# Altium PCB 安抚版大号发球机 1.6mm 双面板.PcbDoc (part 3 of 3)
Units mil, origin at the board's own origin, x right, y up, seen from the top; angles counter-clockwise.
Board outline 2637.8 x 5118.11 mil, 2 copper layers (Top Layer, Bottom Layer); 155 components, 97 nets, 435 pads, 221 vias.
Unrouted connection lines stored in the file: 1.
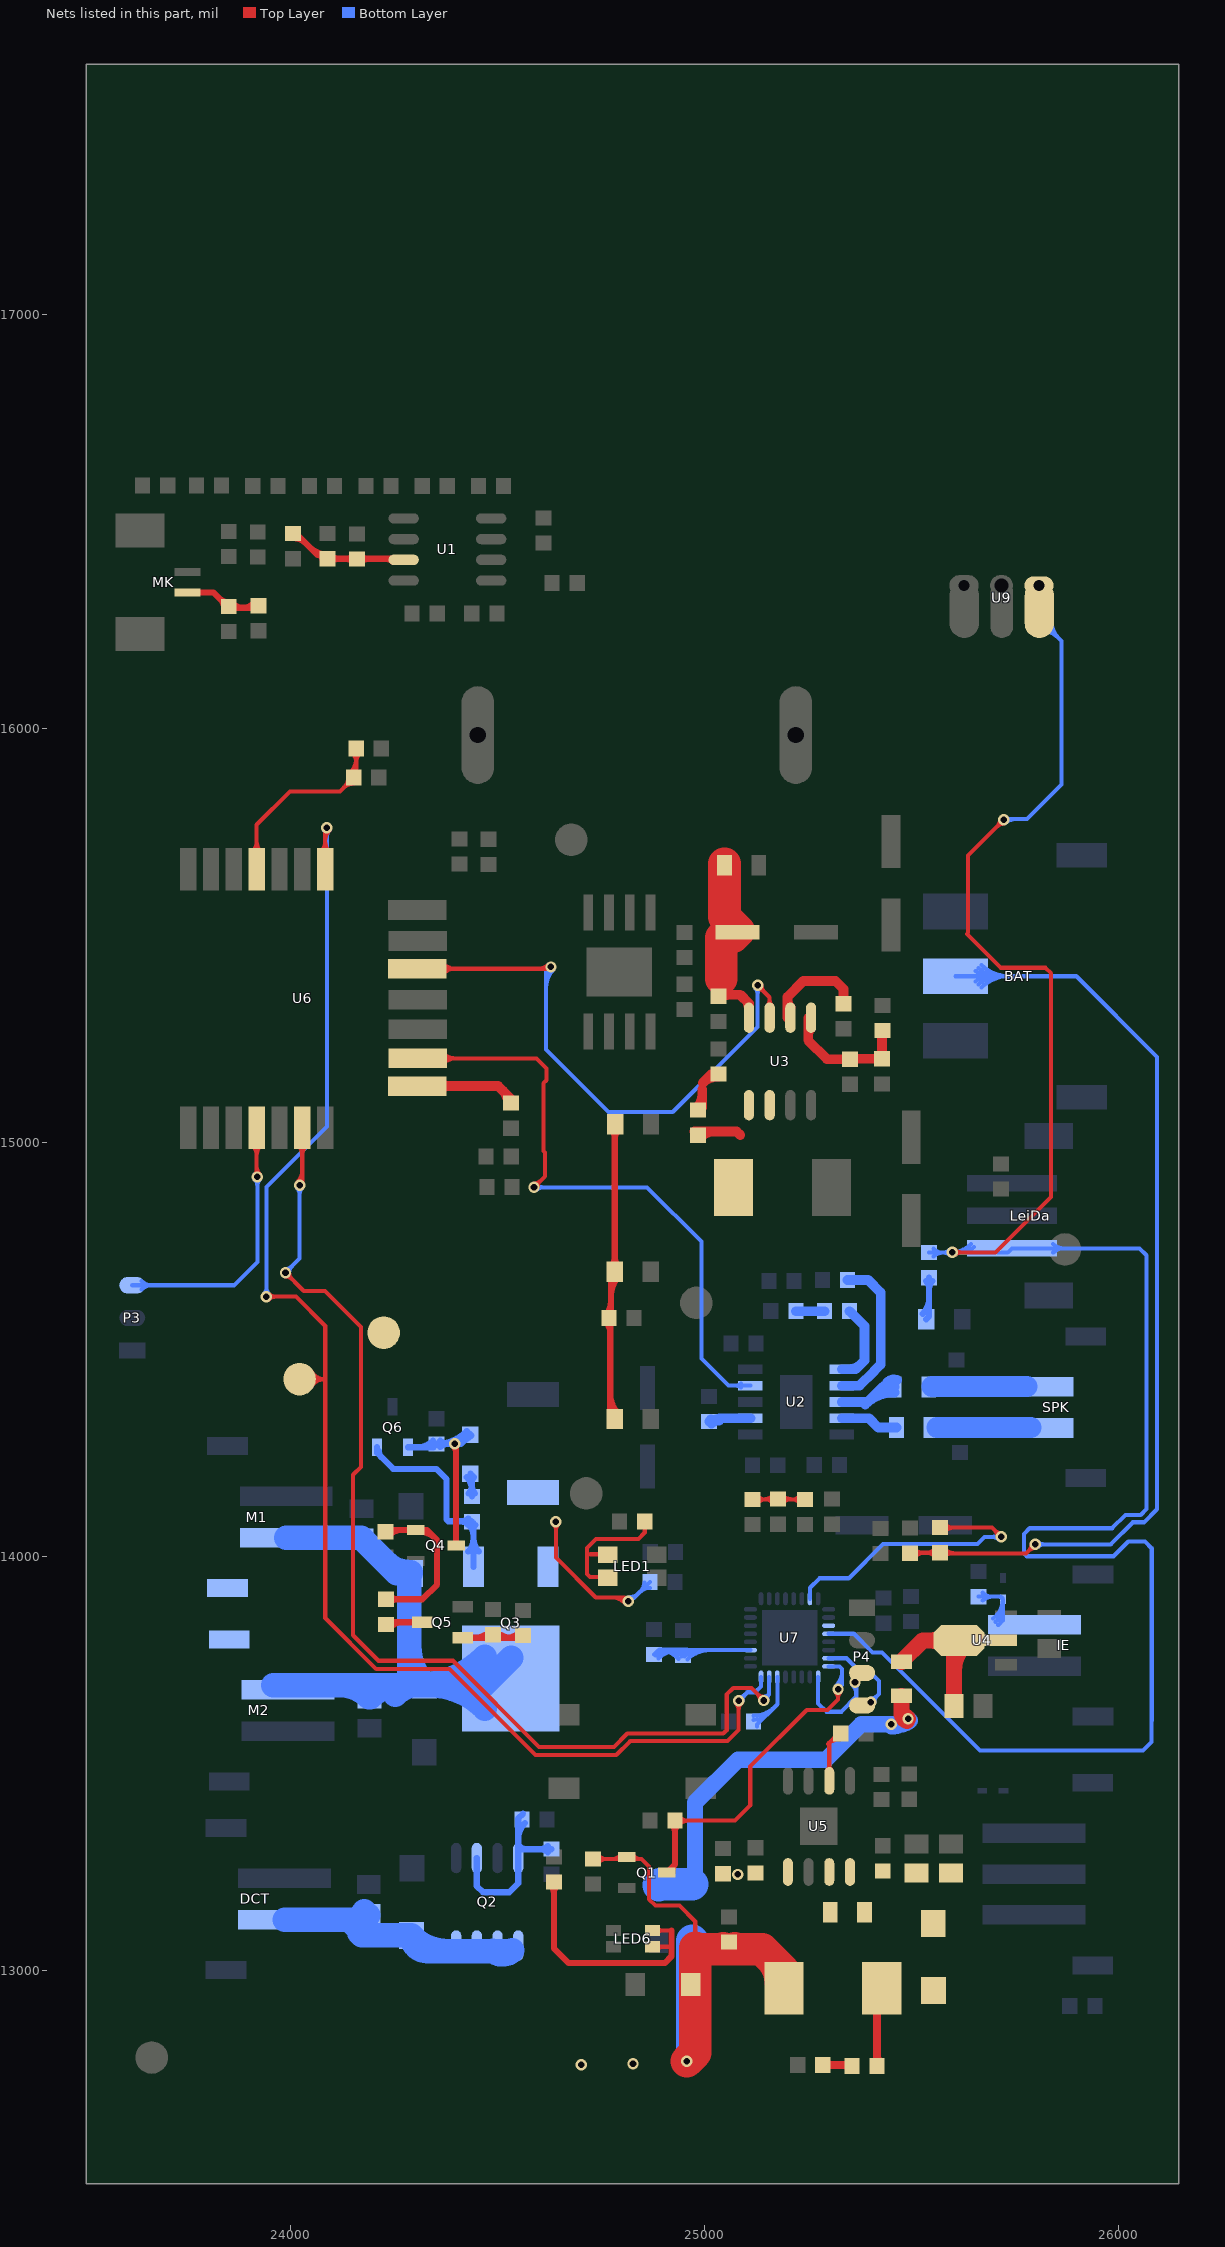
[diagram p3: the nets of this part, all layers, seen from the top]

## Via types
v1: diameter 27.56, hole 15.75, Top Layer to Bottom Layer, tented both sides, 221 vias

## Nets (pads, with @x,y where several pads share a name; then routed paths per layer and width w, separated by ;. In a path a pad name is that pad's centre, name@x,y a point inside that pad or via, vN(x,y) a via of type N, cw(c..) or ccw(c..) an arc to the next point about the centre after c; other vN are vias at no path point) (continued)
NetC13_2: C13.2 U2.2 | length 208.4
  Bottom Layer w23.62: C13.2@25012,14326.69 25014.31,14329 25036,14329 25041.45,14334.45 ; C13.2@25016.62,14332.07 ccw(c25027.59,14348.31) 25041.45,14334.45 ; C13.2@25018.19,14322.8 cw(c25041.45,14305.41) 25041.45,14334.45 ; 25034.25,14329 ccw(c25034.25,14305.42) 25017.58,14322.09 cw(c25047.41,14292.26) 25047.41,14334.45 ; U2.2@25111.53,14334.45 25041.45,14334.45
NetC14_1: C14.1 R10.2 | length 69.1
  Bottom Layer w23.62: C14.1@25221.32,14593 R10.2@25290.37,14593
NetC15_2: C15.2 L1.2 SPK.1 | length 229.4
  Bottom Layer w51.18: L1.2@25549.77,14411 SPK.1@25779.13,14411
NetC17_2: C17.2 L2.2 SPK.2 | length 226.1
  Bottom Layer w51.18: L2.2@25562,14312 SPK.2@25788.13,14312
NetC18_2: C18.2 R11.2 R14.1 U3.1 | length 343.5
  Top Layer w23.62: 25251,15258.97 cw(c25276.33,15258.97) U3.1@25258.42,15276.88 ; U3.1@25251,15301.61 25251,15247 25296.69,15201.31 C18.2@25352,15201.31 ; C18.2@25350,15203.31 C18.2@25352,15201.31 ; R11.2@25430,15270.68 25429,15269.68 R14.1@25429,15202.31 25353,15202.31 C18.2@25352,15201.31
NetC21_1: C21.1 C22.1 FB1.1 U3.4 | length 518.3
  Top Layer w23.62: C22.1@25032,15353.32 25035.68,15357 25087,15357 25108,15336 U3.4@25108,15301.61 ; C22.1@25039.58,15348.72 cw(c25059.56,15328.74) 25059.56,15357 ; 25099.87,15344.14 cw(c25081.65,15325.92) U3.4@25107.41,15325.92
  Top Layer w78.74: 25041,15396 25041,15495 C21.1@25057,15511 ; FB1.1@25049,15673 25049,15545.51 25083.51,15511 C21.1@25069.51,15497 ; 25052.74,15541.77 cw(c25018.98,15508) C21.1@25066.73,15508
NetC23_1: C23.1 R16.2 | length 149.9
  Top Layer w23.62: R16.2@24981.39,15082.91 ccw(c24948.54,15115.76) 24995,15115.76 ; R16.2@24995,15084.63 24995,15129 ; 24996.29,15143.98 cw(c25033.02,15107.25) C23.1@25033.02,15159.19 ; 24998,15145.68 C23.1@25018,15165.68
NetC25_2: C25.2 R18.2 U4.2 | length 457.1
  Top Layer w39.37: R18.2@25476.06,13746.77 25527.34,13798.06 U4.2@25615.21,13798.06 25602.96,13785.81 C25.2@25602.96,13640 ; U4.2@25578.07,13785.53 ccw(c25547.83,13755.28) 25547.83,13798.06 ccw(c25547.83,13840.83) U4.2@25578.07,13810.58 ; 25602.96,13725.72 cw(c25687.54,13725.72) U4.2@25627.73,13785.53
NetC28_1: C28.1 D4.1 DCT.1 Q2.5 Q2.6 Q2.7 Q2.8 | length 972.3
  Bottom Layer w59.06: DCT.1@23986.87,13124 24143,13124 ; C28.1@24175.04,13124 24143,13124 ; D4.1@24293.42,13083.99 ccw(c24380.31,13170.88) 24380.31,13048 ; D4.1@24293.59,13083.6 ccw(c24330.94,13085.39) 24330.94,13048 ; Q2.6@24489.64,13048.57 ccw(c24512.56,13074.44) 24537,13050 24535,13048 24501,13048 24330.94,13048 ; 24143,13124 24167,13100 24167,13092 24173.06,13085.94 D4.1@24293,13085.94 24330.94,13048 ; C28.1@24163.94,13124 ccw(c24163.94,13158.92) C28.1@24188.63,13134.23 ; C28.1@24163.94,13124 ccw(c24163.94,13158.92) C28.1@24188.63,13134.23 ; C28.1@24163.94,13124 ccw(c24163.94,13158.92) C28.1@24188.63,13134.23 ; 24167,13114.32 cw(c24208.53,13114.32) 24179.16,13143.69 ccw(c24208.53,13114.32) 24167,13114.32
NetC32_2: C32.2 R21.2 | length 121.2
  Top Layer w20: C32.2@25286.31,12773 25354.68,12773 R21.2@25356.68,12771 ; C32.2@25292.19,12767.13 cw(c25306.37,12752.94) 25306.37,12773 cw(c25306.37,12793.06) C32.2@25292.19,12778.87 ; 25334.18,12773 cw(c25334.18,12749.48) R21.2@25350.81,12766.11
NetC33_2: C33.2 C34.2 C35.2 D5.2 U5.4
NetC36_1: C36.1 C37.1 D6.1 D7.1 M1.1 M1.3 M2.2 M2.4 Q3.2 | length 1996.1
  Bottom Layer w59.06: M2.2@23958.94,13690.06 24277,13690.06 ; M1.1@23990.87,14046 C36.1@24172,14045.96 C36.1@24172,14045.96 24258.02,13959.94 D7.1@24291,13959.94 ; 24119.92,13690.06 cw(c24119.92,13590.06) C37.1@24190.63,13660.77 ; C37.1@24193.37,13660.77 cw(c24264.08,13590.06) 24264.08,13690.06 ; 24229.66,13988.3 ccw(c24291,14049.64) D7.1@24291,13962.89 ; 24254.19,13667.25 cw(c24314.95,13606.48) D6.1@24324.93,13691.84 ; 24265.19,13678.25 cw(c24305.83,13637.61) D6.1@24324.8,13691.87 ; 24288,13783.16 ccw(c24415.73,13783.16) D6.1@24325.41,13692.84 ; D7.1@24288,13940 24288,13701.07 24277,13690.06 ; D6.1@24304.43,13690.06 ccw(c24304.43,13924.73) Q3.2@24470.36,13758.79 ; D6.1@24333.86,13690.06 cw(c24333.86,13497.01) Q3.2@24470.36,13633.52 ; Q3.2@24534,13756 24468.06,13690.06 24277,13690.06
NetC48_2: C48.2 R41.2 U7.3 | length 841.4
  Bottom Layer w10: R41.2@24879,13763.68 R41.2@24890.02,13774.7 ; 24912.05,13774.7 cw(c24912.05,13730.23) C48.2@24945.53,13759.51 ; 24912.52,13775.68 cw(c24912.52,13733.93) C48.2@24945.41,13759.65 ; 24914.57,13774.7 ccw(c24914.57,13729.1) 24882.32,13761.35 cw(c24916.94,13726.73) 24916.94,13775.68 ; C48.2@24933.03,13775.68 cw(c24933.03,13749.97) C48.2@24953.29,13765.81 ; C48.2@24934.08,13774.7 cw(c24934.08,13749.5) C48.2@24953.05,13766.09 ; C48.2@24937.53,13753.49 ccw(c24892,13717.88) 24892,13775.68 C48.2@24959,13775.68 ; C48.2@24938,13752.93 ccw(c24890.02,13710.97) R41.2@24890.02,13774.7 ; C48.2@24938.71,13774.7 ccw(c24938.71,13704.96) 24889.39,13754.27 cw(c24941.08,13702.59) C48.2@24941.08,13775.68 ; C48.2@24945.25,13766.42 cw(c24965.25,13746.42) C48.2@24965.25,13774.7 ; C48.2@24952.32,13759.35 cw(c24989.39,13722.28) 24989.39,13774.7 ; C48.2@24959.39,13752.28 cw(c25013.54,13698.13) 25013.54,13774.7 ; U7.3@25111.51,13774.7 24963.98,13774.7 R41.2@24890.02,13774.7
NetC50_1: C50.1 MK.2 R49.2 | length 302.1
  Top Layer w15: MK.2@23752.08,16328.4 23814.92,16328.4 23850,16293.32 23852,16291.32 C50.1@23923,16291.32 ; 23829.13,16314.19 ccw(c23851.02,16336.08) R49.2@23851.02,16305.12 ; R49.2@23833.99,16309.32 cw(c23818.98,16294.32) R49.2@23840.21,16294.32 ; R49.2@23860.63,16286.67 cw(c23871.83,16275.47) 23871.83,16291.32 ; R49.2@23860.63,16301.96 ccw(c23886.32,16327.65) 23886.32,16291.32 ; 23884.85,16291.32 ccw(c23884.85,16334.48) C50.1@23915.37,16303.96
NetD5_1: D5.1 FB2.2 L4.2 R21.1 | length 223.4
  Top Layer w20: R21.1@25411.44,12777.86 ccw(c25397.26,12792.04) 25417.31,12792.04 ccw(c25437.37,12792.04) R21.1@25423.19,12777.86 ; R21.1@25417.31,12771 25417.31,12947.13 L4.2@25428.46,12958.28
NetD8_1: D8.1 Q4.3 Q6.1 R38.2 | length 738.5
  Top Layer w15: v1@24393.56,14268.56 cw(c24375.75,14250.75) 24400.94,14250.75 ; v1(24398,14273) 24400.94,14270.06 Q4.3@24400.94,14027.52
  Bottom Layer w15: Q6.1@24284.92,14264.69 24346.01,14264.69 R38.2@24354,14272.68 ; 24307.63,14264.69 ccw(c24307.63,14318.07) R38.2@24345.37,14280.33 ; R38.2@24362.63,14265.04 cw(c24381.07,14246.59) 24381.07,14272.68 cw(c24381.07,14298.77) R38.2@24362.63,14280.33 ; 24382.08,14272.68 ccw(c24382.08,14288.92) v1@24393.56,14277.44 ; 24383.6,14272.68 cw(c24383.6,14258.6) v1@24393.56,14268.56 ; v1@24389.4,14272.68 ccw(c24389.4,14339.5) D8.1@24437.41,14293.03 ; v1@24398,14279.28 ccw(c24398,14331.61) D8.1@24435,14294.61 ; v1@24402.44,14268.56 cw(c24412.4,14258.6) 24412.4,14272.68 ; v1@24402.61,14277.26 ccw(c24413.08,14286.94) 24413.08,14272.68 ; D8.1@24426.63,14303.46 cw(c24354,14373.75) R38.2@24354,14272.68 ; D8.1@24432.68,14297.69 D8.1@24435.38,14294.99 24413.08,14272.68 ; R38.2@24354,14272.68 24413.08,14272.68
NetD8_2: D8.2 R32.2 | length 143.9
  Bottom Layer w15: D8.2@24426.77,14191.89 cw(c24397.23,14162.36) R32.2@24439,14162.36 ; R32.2@24431.36,14152.96 ccw(c24412.91,14171.41) 24439,14171.41 ccw(c24465.09,14171.41) R32.2@24446.64,14152.96 ; D8.2@24435.38,14200.51 24439,14196.89 R32.2@24439,14145.32 ; 24439,14179.82 cw(c24456.07,14179.82) D8.2@24444,14191.89
NetD9_2: D9.2 IE.1 R46.2 | length 292.6
  Bottom Layer w10: R46.2@25662,13903.68 25714.72,13903.68 D9.2@25721,13897.41 ; R46.2@25672.39,13894.27 cw(c25695.11,13871.56) 25695.11,13903.68 cw(c25695.11,13935.81) R46.2@25672.39,13913.09 ; IE.1@25697.52,13851 ccw(c25663.41,13897.41) D9.2@25721,13897.41 ; IE.1@25703.45,13842.95 ccw(c25677.94,13877.64) 25721,13877.64 ; IE.1@25709.37,13834.89 ccw(c25692.47,13857.88) IE.1@25721,13857.88 ; 25712.22,13903.68 cw(c25712.22,13893.35) D9.2@25719.52,13900.66 ; IE.1@25721,13846 D9.2@25721,13897.41
NetFB2_1: FB2.1 U5.3
NetJ1_2: BAT.2 R19.2 R20.1 | length 2853.4
  Top Layer w10: R20.1@25497,14008.69 25498,14009.68 R19.2@25569,14009.68 25570.68,14008 25645,14008 ; R20.1@25507.39,13999.28 cw(c25532.52,13974.15) 25532.52,14009.68 ; R20.1@25507.39,14018.1 ccw(c25527.7,14038.4) 25527.7,14009.68 ; R19.2@25558.61,14000.27 ccw(c25535.89,13977.56) 25535.89,14009.68 ccw(c25535.89,14041.81) R19.2@25558.61,14019.09 ; R19.2@25579.39,14000.27 cw(c25598.04,13981.62) 25598.04,14008 ; R19.2@25579.39,14019.09 ccw(c25606.18,14045.88) 25606.18,14008 ; 25658,14008 25645,14008 ; v1@25790.22,14030 cw(c25769.02,14030) 25784.01,14015.01 cw(c25799,14000.02) v1@25799,14021.22 ; v1(25799,14030) 25777,14008 25645,14008
  Bottom Layer w10: BAT.2@25606.77,15401.73 25898.27,15401.73 26093,15207 26093,14114.83 26061.37,14083.2 26034.56,14083.2 25981.36,14030 v1(25799,14030) ; BAT.2@25655.15,15388.79 cw(c25686.4,15357.54) 25686.4,15401.73 cw(c25686.4,15445.93) BAT.2@25655.15,15414.68 ; BAT.2@25662.22,15381.72 cw(c25710.54,15333.39) 25710.54,15401.73 cw(c25710.54,15470.07) BAT.2@25662.22,15421.75 ; BAT.2@25669.29,15374.65 cw(c25734.68,15309.25) 25734.68,15401.73 cw(c25734.68,15494.21) BAT.2@25669.29,15428.82 ; v1@25805.21,14023.79 cw(c25820.2,14008.8) 25820.2,14030 cw(c25820.2,14051.2) v1@25805.21,14036.21
NetL3_1: L3.1 R16.1 U3.5 U3.6 | length 151
  Top Layer w23.62: R16.1@24976,15026.69 25078.31,15026.69 25087,15018 ; R16.1@24990.58,15013.09 cw(c25023.4,14980.28) 25023.4,15026.69
NetLED1_3: LED1.3 LED1.4 R23.2 | length 341.6
  Top Layer w10: 24725,14006 24766.08,14006 LED1.4@24767.52,14004.56 ; LED1.3@24767.52,13949.44 24765.96,13951 24724,13951 24717,13958 24717,14021 24739,14043 24841,14043 24856.32,14058.32 R23.2@24856.32,14085
NetLED2_1: LED2.1 R44.2 | length 186
  Bottom Layer w15: LED2.1@25527.4,14586.94 ccw(c25489.74,14624.6) 25543,14624.6 ; R44.2@25535.36,14666.04 cw(c25516.91,14647.59) 25543,14647.59 cw(c25569.09,14647.59) R44.2@25550.64,14666.04 ; LED2.1@25536.02,14573.4 25543,14580.39 R44.2@25543,14673.68
NetLED3_1: LED3.1 LED4.1 LED5.1 R45.2 | length 1015.8
  Top Layer w10: LED4.1@24784.02,14688.6 LED4.1@24785.02,14689.6
  Top Layer w15: R45.2@24762.04,14567.37 cw(c24735.59,14540.92) 24773,14540.92 ; R45.2@24762.04,14584.63 ccw(c24730.76,14615.91) 24775,14615.91 ; LED5.1@24773,14343.27 R45.2@24773,14572 ; 24773,14357.32 ccw(c24803.81,14357.32) LED5.1@24782.03,14335.53 ; 24773,14393.53 ccw(c24840.03,14393.53) LED5.1@24792.63,14346.14 ; R45.2@24773,14556.93 cw(c24787.77,14556.93) R45.2@24777.33,14567.37 ; R45.2@24775,14566.67 LED4.1@24775,14664 ; 24775,14632.49 cw(c24835.2,14632.49) LED4.1@24792.63,14675.06 ; LED4.1@24775.4,14702.14 ccw(c24754.6,14722.94) 24784.02,14722.94 ccw(c24813.43,14722.94) LED4.1@24792.63,14702.14 ; LED3.1@24776.4,15031.06 cw(c24758.01,15012.67) 24784.02,15012.67 ; LED5.1@24784.02,14332.6 LED5.1@24795.68,14344.27 ; 24784.02,15007.85 cw(c24816.85,15007.85) LED3.1@24793.63,15031.06 ; LED3.1@24785.02,15044.6 24784.02,15043.6 LED4.1@24784.02,14688.6 24784.02,14682 LED4.1@24795.68,14670.33
NetLED6_2: LED6.2 LED6.4 R48.2 | length 727.1
  Top Layer w10: LED6.4@24875.24,13058.32 24919.69,13058.32 24921,13057 ; LED6.2@24875.24,13097.68 24920.31,13097.68 24921,13097 ; LED6.4@24885.39,13052.11 cw(c24900.37,13037.12) 24900.37,13058.31 cw(c24900.37,13079.51) LED6.4@24885.39,13064.52 ; LED6.2@24885.39,13091.48 cw(c24900.37,13076.49) 24900.37,13097.68 cw(c24900.37,13118.88) LED6.2@24885.39,13103.89
  Top Layer w15: R48.2@24629.36,13207.04 cw(c24610.91,13188.59) 24637,13188.59 cw(c24663.09,13188.59) R48.2@24644.64,13207.04 ; R48.2@24637,13214.68 24637,13055 24673,13019 24905,13019 24921,13035 24921,13057 24921,13097
NetQ2_2: Q2.2 Q2.4 R24.2 R25.2 | length 537.8
  Bottom Layer w15: Q2.2@24451,13272.61 24451,13205 24466,13190 24529,13190 24551,13212 Q2.4@24551,13272.61 24551,13368.32 R24.2@24562.68,13380 ; Q2.4@24551,13294 24630.68,13294 R25.2@24631,13294.32 ; 24551,13317.96 cw(c24606.74,13317.96) R24.2@24567.33,13357.37 ; Q2.4@24554.47,13300.39 ccw(c24569.89,13315.81) 24569.89,13294 ; 24603.16,13294 ccw(c24603.16,13321.17) R25.2@24622.37,13301.96 ; 24604.69,13294 cw(c24604.69,13268.99) R25.2@24622.37,13286.67
NetQ3_1: Q3.1 Q6.2 R32.1 | length 646.1
  Bottom Layer w15: Q6.2@24210.12,14264.69 24210.12,14250.88 24249,14212 24353,14212 24378,14187 24378,14090 24382,14086 24437.69,14086 R32.1@24439,14084.69 24443,14080.69 Q3.1@24443,13976 ; Q6.2@24214.43,14255.44 ccw(c24235.84,14255.44) 24220.7,14240.3 ; 24408.75,14086 cw(c24408.75,14055.42) R32.1@24430.37,14077.04 ; 24415.1,14086 ccw(c24415.1,14107.6) R32.1@24430.37,14092.33 ; Q3.1@24430.21,14012.41 ccw(c24399.33,14043.3) 24443,14043.3 ccw(c24486.67,14043.3) Q3.1@24455.79,14012.41 ; R32.1@24432.34,14077.04 cw(c24406.61,14051.31) 24443,14051.31 ; 24443,14065.88 cw(c24458.79,14065.88) R32.1@24447.63,14077.04
NetQ3_3: Q3.3 R35.2 R39.2 | length 566.1
  Top Layer w10: v1@24635.79,14078.79 cw(c24620.8,14063.8) 24642,14063.8 cw(c24663.2,14063.8) v1@24648.21,14078.79 ; v1(24642,14085) 24642,13997.91 24738,13901.91 24808.09,13901.91 v1(24817,13893) ; 24774.29,13901.91 cw(c24774.29,13850.29) v1@24810.79,13886.79 ; 24798.43,13901.91 cw(c24798.43,13874.43) v1@24817.86,13893.86
  Bottom Layer w10: v1(24817,13893) 24817,13902 24831.68,13902 ; v1@24817,13901.78 ccw(c24817,13936.7) 24841.69,13912.01 ; v1@24821.36,13900.62 ccw(c24825.62,13908.06) 24831.68,13902 ; 24844.29,13914.6 cw(c24868.68,13890.21) R35.2@24868.68,13924.71 ; 24846.66,13916.98 ccw(c24825.63,13938.02) R35.2@24855.38,13938.02 ; R35.2@24868.68,13939 24831.68,13902
NetQ4_1: Q4.1 R26.1 R28.2 | length 521.4
  Top Layer w15: R26.1@24231,14060.31 24235.61,14064.92 Q4.1@24303.69,14064.92 24330.08,14064.92 24355,14040 24355,13933 24319.32,13897.32 R28.2@24232,13897.32 ; R26.1@24239.63,14052.67 cw(c24269.2,14023.1) 24269.2,14064.92 ; R28.2@24240.63,13889.67 cw(c24259.07,13871.23) 24259.07,13897.32 cw(c24259.07,13923.41) R28.2@24240.63,13904.96 ; Q4.1@24312.94,14060.61 cw(c24312.94,14008.84) 24349.55,14045.45 ; Q4.1@24314.65,14060.96 cw(c24323.25,14040.96) 24338.64,14056.36
NetQ5_1: Q5.1 R31.2 R36.2 | length 284.8
  Top Layer w15: Q5.1@24417.21,13804.6 24557.91,13804.6 R31.2@24563,13809.68 ; Q5.1@24432.48,13800.16 cw(c24443.2,13789.44) 24443.2,13804.6 cw(c24443.2,13819.76) Q5.1@24432.48,13809.04 ; 24445.82,13804.6 ccw(c24445.82,13854.88) R36.2@24481.37,13819.33 ; R36.2@24498.63,13819.33 ccw(c24534.18,13854.88) 24534.18,13804.6 ; 24523.65,13804.6 ccw(c24523.65,13848.05) R31.2@24554.37,13817.33
NetQ5_3: Q5.3 R28.1 | length 147.5
  Top Layer w15: R28.1@24232,13836.69 24237.31,13842 Q5.3@24318.79,13842 ; R28.1@24240.63,13829.04 cw(c24271.9,13797.77) 24271.9,13842 ; Q5.3@24303.52,13837.56 ccw(c24292.8,13826.84) 24292.8,13842 ccw(c24292.8,13857.16) Q5.3@24303.52,13846.44
NetR3_1: R3.1 R4.1 R50.1 U1.3 | length 543.8
  Top Layer w15: R50.1@24007,16470.31 24014.69,16470.31 24066,16419 ; R50.1@24007.98,16459.51 cw(c24007.98,16417.24) 24037.87,16447.13 ; 24047.18,16437.82 ccw(c24089.02,16479.66) R4.1@24089.02,16420.49 ; R4.1@24078.31,16408.24 ccw(c24066,16406.58) 24066,16419 ; R4.1@24098.63,16402.04 cw(c24117.07,16383.6) 24117.07,16409.69 cw(c24117.07,16435.78) R4.1@24098.63,16417.33 ; 24132.51,16409.69 cw(c24132.51,16380.18) R3.1@24153.37,16401.04 ; 24137.34,16409.69 ccw(c24137.34,16432.36) R3.1@24153.37,16416.33 ; R3.1@24170.63,16401.04 cw(c24191.49,16380.18) 24191.49,16409.69 ; R3.1@24170.63,16416.33 ccw(c24186.66,16432.36) 24186.66,16409.69 ; 24231.76,16409.69 cw(c24231.76,16388.68) U1.3@24246.61,16403.53 ; U1.3@24286.39,16404 24280.7,16409.69 R4.1@24090,16409.69 24080.69,16419 24066,16419
NetR9_2: R9.2 U2.7 | length 381.5
  Bottom Layer w23.62: U2.7@25331.99,14413.19 25375.19,14413.19 25409.57,14447.57 25409.57,14448.09 25426,14464.52 25426,14638 25396,14668 R9.2@25346,14668
NetR10_1: R10.1 U2.6 | length 227.8
  Bottom Layer w23.62: U2.6@25332,14452.56 25365.56,14452.56 25387,14474 25387,14557 R10.1@25351,14593 ; U2.6@25349.71,14452.56 ccw(c25349.71,14490.82) 25376.77,14463.77
NetR13_1: R13.1 U3.2 | length 264.6
  Top Layer w23.62: U3.2@25201,15301.61 25201,15352 25239,15390 25317,15390 25336,15371 R13.1@25336,15335.31 ; 25201,15344.25 ccw(c25226.33,15344.25) U3.2@25208.42,15326.34
NetR22_1: R22.1 U5.6 | length 221.7
  Top Layer w10: U5.6@25297.05,13485.41 ccw(c25285.1,13497.36) 25302,13497.36 ccw(c25318.9,13497.36) U5.6@25306.95,13485.41 ; 25298.51,13547.82 cw(c25325.25,13521.08) R22.1@25328.53,13558.76 ; U5.6@25302,13459 25302,13551.31 R22.1@25330.69,13580 ; R22.1@25311.91,13561.22 ccw(c25301.11,13572.02) R22.1@25316.38,13572.02 ; R22.1@25313.68,13563 cw(c25327.68,13549) R22.1@25329.4,13568.72
NetR27_2: R27.2 R30.1 R34.1 | length 328.9
  Top Layer w10: R27.2@25116,14138.32 R30.1@25243,14138.31 ; R27.2@25126.39,14128.91 cw(c25149.11,14106.19) 25149.11,14138.32 cw(c25149.11,14170.44) R27.2@25126.39,14147.73 ; 25142.48,14138.32 ccw(c25142.48,14173.85) R34.1@25167.61,14148.72 ; 25147.3,14138.32 cw(c25147.3,14109.6) R34.1@25167.61,14129.9 ; R34.1@25188.39,14129.9 cw(c25208.7,14109.6) 25208.7,14138.32 ; R34.1@25188.39,14148.72 ccw(c25213.52,14173.85) 25213.52,14138.32 ; R30.1@25232.61,14128.9 ccw(c25209.88,14106.18) 25209.88,14138.32 ccw(c25209.89,14170.44) R30.1@25232.61,14147.72
NetR29_2: R29.2 U6.8 | length 324.5
  Top Layer w23.62: U6.8@24307.06,15136.43 24502.57,15136.43 R29.2@24538.68,15100.32 ; U6.8@24362.66,15128.07 cw(c24382.82,15107.91) 24382.82,15136.43 cw(c24382.82,15164.94) U6.8@24362.66,15144.78 ; 24513.84,15125.16 cw(c24484,15095.32) R29.2@24526.2,15095.32
NetR43_1: R43.1 U7.30 | length 233.1
  Bottom Layer w10: R43.1@25119.31,13606.29 ccw(c25119.31,13653.42) 25152.64,13620.1 ; R43.1@25119.31,13616.29 ccw(c25119.31,13687.56) 25169.71,13637.17 ; R43.1@25127.31,13590 25127.31,13594.77 25176.48,13643.93 U7.30@25176.48,13709.75
NTC_CON: R19.1 U7.15 | length 813.4
  Top Layer w10: R19.1@25569,14070.31 25694.69,14070.31 v1(25717,14048) ; R19.1@25579.39,14060.9 cw(c25602.11,14038.19) 25602.11,14070.31 cw(c25602.11,14102.44) R19.1@25579.39,14079.72 ; v1@25708.22,14048 ccw(c25687.02,14048) 25702.01,14062.99 ccw(c25717,14077.98) v1@25717,14056.78
  Bottom Layer w10: U7.15@25255.23,13898.72 25255.23,13925.23 25278,13948 25349,13948 25432,14031 25660,14031 25677,14048 v1(25717,14048) ; v1@25710.79,14041.79 ccw(c25695.8,14026.8) 25695.8,14048 ccw(c25695.8,14069.2) v1@25710.79,14054.21
O: LeiDa.3 R44.1 U7.20 U9.3 | length 5687.1
  Top Layer w10: v1(25599,14735) 25703,14735 25837,14869 25837,15409 25824,15422 25716,15422 25634,15504 25637.19,15507.19 25637.19,15693.19 v1(25723,15779) ; v1@25605.21,14728.79 cw(c25620.2,14713.8) 25620.2,14735 cw(c25620.2,14756.2) v1@25605.21,14741.21 ; v1@25714.22,15779 cw(c25693.02,15779) 25708.01,15764.01 cw(c25723,15749.02) v1@25723,15770.22
  Bottom Layer w10: U7.20@25300.51,13814.08 25361.16,13814.08 25406.39,13768.85 25429.39,13768.85 25666.24,13532 26059,13532 26080,13553 26080,13603.5 26080.5,13604 26080.5,14020.5 26064,14037 26023.71,14037 25987.93,14001.22 25778.78,14001.22 25772.22,14007.78 25772.22,14055.22 25786,14069 25985,14069 26017,14101 26054,14101 26068,14115 26068,14164 26068,14728 26051.33,14744.67 LeiDa.3@25743.27,14744.67 25732.92,14734.31 R44.1@25543,14734.31 ; R44.1@25553.39,14724.9 cw(c25576.11,14702.19) 25576.11,14734.31 cw(c25576.11,14766.44) R44.1@25553.39,14743.72 ; 25576.15,14734.31 ccw(c25576.15,14757.85) v1@25592.79,14741.21 ; 25579.46,14734.31 cw(c25579.46,14715.46) v1@25592.79,14728.79 ; v1@25594.24,14734.31 ccw(c25594.24,14805.11) LeiDa.3@25644.3,14755.05 ; v1@25605.21,14728.79 cw(c25618.54,14715.46) 25618.54,14734.31 ; v1@25605.21,14741.21 ccw(c25621.85,14757.85) 25621.85,14734.31 ; 25618.38,14734.31 ccw(c25618.38,14780.97) LeiDa.3@25651.37,14747.98 ; v1@25723,15781 25779,15781 25862.75,15864.75 25862.75,16211.25 U9.3@25809,16265 ; v1@25729.21,15772.79 cw(c25749.02,15752.98) 25749.02,15781 ; v1@25729.21,15785.21 ccw(c25739.37,15795.37) 25739.37,15781 ; U9.3@25810.59,16243.22 cw(c25815.91,16208.74) 25840.59,16233.41 ; U9.3@25812.12,16233.34 cw(c25819.64,16184.58) 25854.53,16219.47 ; U9.3@25839.43,16253.54 ccw(c25885.23,16253.54) 25852.85,16221.15 ; LeiDa.3@25842.23,14734.28 cw(c25867.3,14709.21) 25867.3,14744.67 cw(c25867.3,14780.12) LeiDa.3@25842.23,14755.05
OUTN: L2.1 U2.9 | length 165.5
  Bottom Layer w23.62: U2.9@25331.99,14334.45 25397.55,14334.45 25419.94,14312.06 ; 25444.09,14312.06 25419.94,14312.06 ; L2.1@25464.09,14312.06 25419.94,14312.06
OUTP: L1.1 U2.8 | length 321.4
  Bottom Layer w23.62: U2.8@25331.99,14373.82 25394.82,14373.82 25431.06,14410.06 L1.1@25459.09,14410.06 ; 25388.71,14367.71 cw(c25459.09,14297.33) L1.1@25459.09,14396.87 ; 25417.04,14396.04 cw(c25443.56,14369.51) L1.1@25456.98,14404.54 ; 25429.04,14408.04 cw(c25459.09,14377.98) L1.1@25459.09,14420.49 ; L1.1@25442.78,14421.78 cw(c25457.82,14406.73) L1.1@25465.43,14426.6
RESET: C44.2 R33.2 U6.18 | length 702.7
  Top Layer w10: U6.18@23909.03,15701.86 ccw(c23883.96,15726.93) 23919.42,15726.93 ccw(c23954.87,15726.93) U6.18@23929.8,15701.86 ; U6.18@23919.42,15659.98 23919.42,15767.42 23999.85,15847.85 24120.53,15847.85 C44.2@24153.69,15881 ; 24129.29,15856.6 cw(c24153.69,15832.21) C44.2@24153.69,15866.71 ; 24131.67,15858.98 ccw(c24110.63,15880.02) C44.2@24140.38,15880.02 ; C44.2@24144.28,15891.39 ccw(c24107.08,15928.59) 24159.68,15928.59 ; R33.2@24150.27,15940.61 cw(c24127.56,15917.89) 24159.68,15917.89 cw(c24191.81,15917.89) R33.2@24169.09,15940.61 ; C44.2@24151.35,15884.32 ccw(c24131.22,15904.45) 24159.68,15904.45 ; C44.2@24159.68,15899.63 ccw(c24171.33,15899.63) C44.2@24163.1,15891.39 ; R33.2@24159.68,15951 24159.68,15887 C44.2@24153.69,15881 ; C44.2@24165.68,15881 C44.2@24153.69,15881
RX: TP4.1@24226,14541 U6.6 U7.31 | length 2907.3
  Top Layer w10: v1@23989,14677.22 cw(c23989,14656.02) 24003.99,14671.01 cw(c24018.98,14686) v1@23997.78,14686 ; v1(23989,14686) 24033,14642 24084,14642 24171,14555 24171,14217 24152,14198 24152,13810.46 24213.46,13749 24393,13749 24601,13541 24782.09,13541 24814.09,13573 25046,13573 25054.22,13581.22 25054.22,13667.22 25070,13683 25114,13683 v1(25144,13653) ; v1@24016.79,14903.21 ccw(c23985.89,14934.11) 24029.59,14934.11 ; U6.6@24019.21,14994.12 cw(c23994.14,14969.05) 24029.59,14969.05 cw(c24065.04,14969.05) U6.6@24039.97,14994.12 ; v1(24023,14897) 24029.59,14903.59 U6.6@24029.59,15036 ; v1@24023.86,14896.14 ccw(c24010.04,14909.96) 24029.59,14909.96 ; v1@25135.22,13653 ccw(c25114.02,13653) 25129.01,13667.99 ccw(c25144,13682.98) v1@25144,13661.78
  Bottom Layer w10: v1(23989,14686) 24023,14720 v1(24023,14897) ; v1@23989,14694.78 ccw(c23989,14715.98) 24003.99,14700.99 ccw(c24018.98,14686) v1@23997.78,14686 ; v1@24016.79,14890.79 cw(c24001.8,14875.8) 24023,14875.8 cw(c24044.2,14875.8) v1@24029.21,14890.79 ; v1@25142,13654 25156.79,13668.79 ; v1@25144,13661.78 ccw(c25144,13675.73) 25153.87,13665.87 ; v1@25152.6,13654.78 cw(c25167.67,13657.9) 25156.79,13668.79 ; U7.31@25156.79,13709.75 25156.79,13668.79
SPK_CTRL: U2.4 U6.9 | length 1672.1
  Top Layer w10: U6.9@24308.39,15203.29 24594.71,15203.29 24619,15179 24619,15150.46 24612,15143.46 24612,14979.59 24615.58,14976.01 24615.58,14918.58 v1(24589,14892) ; U6.9@24368.81,15190.12 cw(c24400.6,15158.33) 24400.6,15203.29 cw(c24400.6,15248.25) U6.9@24368.81,15216.46 ; v1@24589,14900.78 ccw(c24589,14921.98) 24603.99,14906.99 ccw(c24618.98,14892) v1@24597.78,14892
  Bottom Layer w10: v1(24589,14892) 24862,14892 24993,14761 24993,14479 25058.81,14413.19 U2.4@25111.53,14413.19 ; v1@24595.21,14885.79 cw(c24610.2,14870.8) 24610.2,14892 cw(c24610.2,14913.2) v1@24595.21,14898.21 ; U2.4@25088.99,14408.37 ccw(c25077.37,14396.75) 25077.37,14413.19 ccw(c25077.37,14429.63) U2.4@25088.99,14418.01
SPK_POWER_CON: U3.3 U6.12 | length 1644.3
  Top Layer w10: U6.12@24307.06,15419.89 v1@24625.89,15419.89 ; U6.12@24367.47,15406.72 cw(c24399.26,15374.93) 24399.26,15419.89 cw(c24399.26,15464.85) U6.12@24367.47,15433.06 ; 24598.88,15419.89 ccw(c24598.88,15455.12) v1@24623.79,15430.21 ; v1@25129,15371.22 cw(c25129,15350.02) 25143.99,15365.01 cw(c25158.98,15380) v1@25137.78,15380 ; v1(25129,15380) 25158,15351 U3.3@25158,15301.61 ; U3.3@25152.77,15331.15 ccw(c25140.13,15343.79) 25158,15343.79 ccw(c25175.87,15343.79) U3.3@25163.23,15331.15
  Bottom Layer w10: 24618,15373.83 cw(c24680.17,15373.83) v1@24636.21,15417.79 ; 24618,15397.98 cw(c24656.02,15397.98) v1@24629.14,15424.86 ; v1(24630,15424) 24618,15412 24618,15225 24769,15074 24924,15074 25129,15279 v1(25129,15380) ; v1@25122.79,15373.79 cw(c25107.8,15358.8) 25129,15358.8 cw(c25150.2,15358.8) v1@25135.21,15373.79
SWC: P4.3 U7.25 | length 254.3
  Bottom Layer w10: U7.25@25274.9,13709.75 25274.9,13646.1 25295,13626 25331,13626 25367,13662 v1@25367,13704 ; v1@25357.79,13690.79 cw(c25335.56,13668.56) 25367,13668.56 ; 25367,13683.05 cw(c25377.95,13683.05) v1@25370.21,13690.79
  other v1: 25364,13697
SWD: P4.4 U7.23 | length 236.8
  Bottom Layer w10: U7.23@25300.51,13755.02 25343.85,13755.02 25387.87,13711 25410.87,13711 25422,13699.87 25422,13669 v1(25402,13649) ; v1@25402,13657.78 ccw(c25402,13678.98) 25416.99,13663.99 ccw(c25431.98,13649) v1@25410.78,13649
SWS: P3.3 U6.4 | length 829.3
  Top Layer w10: U6.4@23909.03,14994.06 cw(c23883.96,14968.99) 23919.42,14968.99 cw(c23954.87,14968.99) U6.4@23929.8,14994.06 ; v1@23914.79,14923.21 ccw(c23903.63,14934.37) 23919.42,14934.37 ; v1@23919.42,14915 U6.4@23919.42,15035.94 ; 23919.42,14942.02 ccw(c23946.02,14942.02) v1@23927.21,14923.21
  Bottom Layer w10: P3.3@23619,14655.48 23864.48,14655.48 23921,14712 v1(23921,14917) ; P3.3@23641.19,14645.1 cw(c23666.26,14620.03) 23666.26,14655.48 cw(c23666.26,14690.93) P3.3@23641.19,14665.86 ; v1@23914.79,14910.79 cw(c23899.8,14895.8) 23921,14895.8 cw(c23942.2,14895.8) v1@23927.21,14910.79
TX: TP3.1 U6.15 U7.32 | length 3920.5
  Top Layer w10: v1(23943,14628) 24014,14628 24085,14557 24085,14426 ; v1@23949.21,14621.79 cw(c23964.2,14606.8) 23964.2,14628 cw(c23964.2,14649.2) v1@23949.21,14634.21 ; TP3.1@24023,14429 24082,14429 ; TP3.1@24044.2,14416.98 cw(c24064.83,14405.28) 24064.83,14429 cw(c24064.83,14452.72) TP3.1@24044.2,14441.02 ; TP3.1@24052.9,14412.05 cw(c24082,14395.55) 24082,14429 ; TP3.1@24052.9,14445.95 ccw(c24082,14462.45) 24082,14429 ; U6.15@24074.39,15701.86 ccw(c24049.32,15726.93) 24084.77,15726.93 ccw(c24120.22,15726.93) U6.15@24095.16,15701.86 ; U6.15@24084.77,15659.98 v1@24084.77,15755.77 ; 24084.77,15728.6 cw(c24120.4,15728.6) v1@24095.21,15753.79 ; v1@25076.79,13645.79 cw(c25061.8,13630.8) 25083,13630.8 cw(c25104.2,13630.8) v1@25089.21,13645.79 ; v1(25083,13652) 25083,13581.72 25056.28,13555 24821.54,13555 24787.54,13521 24592.72,13521 24384.72,13729 24208,13729 24085,13852 24085,14426 ; 24082,14429 24085,14426
  Bottom Layer w10: v1@23936.79,14634.21 ccw(c23921.8,14649.2) 23943,14649.2 ccw(c23964.2,14649.2) v1@23949.21,14634.21 ; v1(23943,14628) 23943,14893 24089,15039 v1(24089,15760) ; v1@24082.79,15753.79 cw(c24067.8,15738.8) 24089,15738.8 cw(c24110.2,15738.8) v1@24095.21,15753.79 ; v1(25083,13652) 25104,13673 25123,13673 25137.11,13687.11 U7.32@25137.11,13709.75 ; v1@25083,13660.78 ccw(c25083,13681.98) 25097.99,13666.99 ccw(c25112.98,13652) v1@25091.78,13652
USB_DEC: Q1.3 R12.2 U7.24 | length 1050.7
  Top Layer w10: R12.2@24929.32,13363 25074,13363 25111,13400 25111,13493.47 25247.53,13630 25298,13630 25323,13655 v1(25323,13680) ; R12.2@24938.73,13353.59 cw(c24961.44,13330.87) 24961.44,13363 cw(c24961.44,13395.13) R12.2@24938.73,13372.41 ; v1@25316.79,13673.79 cw(c25301.8,13658.8) 25323,13658.8 cw(c25344.2,13658.8) v1@25329.21,13673.79
  Top Layer w15: Q1.3@24909.94,13237.52 24929.32,13256.9 ; R12.2@24921.67,13354.37 cw(c24903.23,13335.93) 24929.32,13335.93 cw(c24955.41,13335.93) R12.2@24936.96,13354.37 ; Q1.3@24923.43,13238.27 cw(c24944.28,13241.93) 24929.32,13256.9 ; R12.2@24929.32,13363 24929.32,13256.9
  Bottom Layer w10: v1@25316.79,13686.21 ccw(c25277.66,13725.34) 25333,13725.34 ; 25322,13735.34 U7.24@25300.51,13735.34 25326.65,13735.34 25333,13729 25333,13690 v1(25323,13680) ; v1@25323.86,13679.14 ccw(c25301.8,13701.2) 25333,13701.2
V: U7.19
VCC_1: D1.2 D2.2 R18.1 | length 1087.1
  Top Layer w39.37: 25476.06,13633.24 ccw(c25516.24,13633.24) v1@25487.82,13604.82 ; R18.1@25476.06,13664.09 25476.06,13624.94 ; v1@25489.45,13603.67 cw(c25499.64,13624.94) 25476.06,13624.94 ; v1(25492,13609) 25476.06,13624.94
  Bottom Layer w39.37: D1.2@24968.75,13216.16 ccw(c24947.18,13237.73) 24977.69,13237.73 ; D1.2@24971.53,13209.44 24977.69,13215.59 24977.69,13406.63 25081.37,13510.31 25293.31,13510.31 25379,13596 25479,13596 v1(25492,13609) ; v1@25452,13590.09 ccw(c25452,13641.02) v1@25488.01,13605.01 ; 25474.87,13596 ccw(c25474.87,13626.13) v1@25496.18,13604.82
  Bottom Layer w78.74: D2.2@24890.53,13207.44 24892.53,13209.44 D1.2@24971.53,13209.44
  other v1: 25452,13596
VCC_USB: C27.1 C29.1 C49.2 D1.1 D3.2 L4.1 Q1.1 R17.2 U5.1 | length 1437.2
  Top Layer w10: R17.2@24732,13270.32 24848.68,13270.32 ; R17.2@24742.39,13260.91 cw(c24765.11,13238.19) 24765.11,13270.32 cw(c24765.11,13302.44) R17.2@24742.39,13279.73 ; 24775.88,13270.32 ccw(c24775.88,13302.49) Q1.1@24798.62,13279.74 ; Q1.1@24826.86,13279.63 ccw(c24848.68,13300.52) 24848.68,13270.32 ; 24978.37,13055.52 24978.37,13119.63 24940,13158 24882,13158 24867,13173 24867,13252 24848.68,13270.32
  Top Layer w78.74: v1(24958,12782) 24978.37,12802.37 24978.37,13055.52 24981.89,13052 25140,13052 25192.24,12999.76 L4.1@25192.24,12958.28 ; C29.1@25046.09,13054.79 ccw(c25052.83,13061.53) C29.1@25052.83,13052 ; C29.1@25067.17,13052 ccw(c25067.17,13061.53) C29.1@25073.91,13054.79 ; 25160.61,13031.39 cw(c25103.25,12974.03) L4.1@25184.37,12974.03
  Bottom Layer w78.74: 24969,12795 24971.53,12797.53 D1.1@24971.53,13072.83
  other v1: 24703,12774 24828,12776 25081,13233
pads on no net: BAT.5 DCT.4 IR.4 LeiDa.5 MK.3 MK.4 U6.21 U7.6 U7.12

## Polygon pours and split planes (outlines as drawn)
GND on Top Layer "Bottom Layer-No Net" (solid, remove dead copper, pour order 0): 23507.54,14364 23507.54,14590 23752,14590 23756,14586 23750.03,14591.97 23750.03,14766.53 23750.03,14943.03 23754,14947 23764,14957 24373,14957 24373,15647 24387,15661 24368,15680 23742,15680 23737,15680 23737,15857 23737,16114 23740,16117 24341,16117 24362,16096 24362,15877 24362,15845 24373,15834 24382,15825 25113,15825 25304,15825 25335,15794 25355,15774 25355,15687 25355,15673 25436,15592 25439,15589 25974,15589 26145.34,15589 26145.34,12485.84 25144,12485.84 25144,12818 24504,12818 24485,12837 24476,12828 24476,12485.84 23507.54,12485.84
GND on Top Layer "Bottom Layer-No Net" (solid, remove dead copper, pour order 1000): 23750.03,14798 23750.03,14515 23750.03,14413 24283.94,14413 24296.31,14401 24353,14456 24353,14930 23750.03,14930 23749,14929
GND on Bottom Layer "Bottom Layer-No Net" (solid, remove dead copper, pour order 1002): 23782,14413 23780,14415 23780,15839 24056,15839 24134,15917 24168,15951 24168,16172 24467,16172 24470,16175 24472,16173 24472,15691 24472,15660 24280,15468 24222,15410 24222,14711 24222,14536 24075,14389
GND on Bottom Layer "Bottom Layer-No Net" (solid, remove dead copper, pour order 1003): 24940,16115 24942,16113 25104,16113 25104,15228 25115,15217 25206,15126 25405,15126 25548,15126 25563,15111 25563,14849 25563,14217 25565,14215 25543,14237 24795,14237 24795,14858 24801,14864 24793,14872 24657,14872 24657,15433 24679,15455 24940,15716 24940,16115
GND on Bottom Layer "Bottom Layer-No Net" (solid, remove dead copper, pour order 1004): 23507.54,12485.84 24498,12485.84 24498,12861 24141,12861 24072,12930 23684,12930 23650.54,12930 23507.54,13073
GND on Bottom Layer "Bottom Layer-No Net" (solid, remove dead copper, pour order 1005): 24804,14250 24805,14249 24805,12902 25155,12902 25162,12895 25169,12888 25169,12485.84 26145.34,12485.84 26145.34,12981 25744,12981 25740,12977 25743,12980 25743,15433 24773,15433
GND on Bottom Layer "Bottom Layer-No Net" (solid, remove dead copper, pour order 1006): 23507.54,16643 23509.54,16645 24641,16645 24676,16645 24677,16646 24679,16644 24679,16436 24679,16410 24661,16392 24658,16389 24658,16321 24658,16320 24572,16234 24413,16234 24413,16232 24379,16198 24369,16188 24264,16188 24264,16187 24162,16085 24151,16074 24151,15893 24151,15892 24108,15849 24107,15850 23776,15850 23747,15850 23744,15847 23745,15848 23745,16075 23745,16161 23744,16162 23741,16165 23507.54,16165

## Keep-outs
Bottom Overlay:
  lines w1: 24107.93,15989.78 cw(c23979.98,15989.78) 24107.93,15990.08
Keep-Out Layer:
  circle w1: c25672.9,15989.78 r62.99
  circle w1: c23979.98,12800.8 r62.99
  circle w1: c25672.9,12800.8 r62.99
  circle w1: c23979.98,15989.78 r62.99
  lines w1: 23507.54,12485.84 26145.34,12485.84 26145.34,17025 23507.54,17025 23507.54,12485.84 ; 24625,12657.13 25026.58,12657.13 25026.58,12724.06 24625,12724.06 24625,12657.13

## Other copper
Top Layer:
  rectangle net VCC_USB: 24925.69,12728.85 24995.69,12836.85
  rectangle net VCC_USB: 24621.19,12779.68 24962,12867
  rectangle net GND: 24416.19,12537.68 25459.19,12610.68
  rectangle net +5V: 24956,14490 25041,14543
  rectangle net RX: 24171,14535 24203,14548
  rectangle net GND: 25648,13606 25762,13669
  rectangle net GND: 25700,13644 25861,13763
  rectangle net VCC_USB: 24791.69,12727.18 24861.69,12835.18
  rectangle net VCC_USB: 24662.19,12727.18 24732.19,12835.18
  rectangle net GND: 24924.19,12541.68 24994.19,12649.68
  rectangle net GND: 24792.19,12543.68 24862.19,12651.68
  rectangle net GND: 24661.69,12543.18 24731.69,12651.18
  rectangle net NetD5_1: 25368,12891 25483,13181
  rectangle net NetFB2_1: 25284,13111 25320,13274
  rectangle net VCC_USB: 25018,13206 25210,13255
  rectangle net VCC_USB: 25105,13036 25156,13213
  rectangle net NetD5_1: 25440,12895 25616,13014
  rectangle net NetC33_2: 25340,13200 25629,13265
  rectangle net NetC33_2: 25525,13083 25629,13218
  rectangle net GND: 25079,14230 25809,14652
  rectangle net GND: 25010,15216 25055,15304
  rectangle net NetL3_1: 25078,14812 25167,15126
  rectangle net +5V: 25262,14780 25522,14906
  rectangle net GND: 25240,13205 25267,13308
  rectangle net GND: 24690,15390 24844,15446
  rectangle net GND: 24985.85,15210 25081,15238.01
  rectangle net GND: 25197,13308 25240,13393
  rectangle net GND: 25241,13167.91 25266.71,13217
  rectangle net GND: 24741.46,13833.39 24880,13863.5
  rectangle net GND: 25562,15439 25612,15693
  rectangle net GND: 25043,15228 25077,15265
  rectangle net GND: 24374,15464 24467,15511
  rectangle net GND: 24447,12501.65 25144,12555
Bottom Layer:
  rectangle net GND: 24401,14361.94 24549,14841
  rectangle net BAT+: 23750,14128 24141,14419
  rectangle net NetC36_1: 24044,13775 24296,13957
  rectangle net NetC36_1: 24140,13903 24236,14014
  rectangle net NetC36_1: 23800,13903 24173,14070
  rectangle net NetC28_1: 23871,13067 24329,13155
  rectangle net BAT+: 23619,13222 24310,13288
  rectangle net NetC36_1: 23802,13656 24439,13834
  rectangle net BAT+: 23656,13458 24358,13586
  rectangle net VCC_USB: 24620.19,12778.68 25025.19,12867
  rectangle net GND: 24491.69,12519.4 25244.69,12612.18
  rectangle net +5V: 25009,14491 25082,14548
  rectangle net GND: 25511,13444 25534,13566
  rectangle net GND: 25114,12919 25522,13464
  rectangle net GND: 24924.19,12569.1 24994.19,12649.68
  rectangle net GND: 24792.19,12569.68 24862.19,12651.68
  rectangle net GND: 24661.46,12570.1 24731.46,12651.08
  rectangle: 24661.46,12727.68 24731.46,12808.65
  rectangle: 24792.19,12727.68 24862.19,12809.68
  rectangle net NetC9_1: 25304,14054 25389,14306
  rectangle net GND: 25175,14201 25272,14538
  rectangle net +5V: 24877,14202 25135,14270
  rectangle net +5V: 25081,14202 25135,14306
  rectangle net +5V: 24800,14164 24882,14282
  rectangle net NetQ3_3: 24508,13920 24656,14206
  rectangle net GND: 24401,14337 24760,14841
  rectangle net GND: 23752,14675 23780,14923.65
  rectangle net GND: 25713,13435 26036,13479
  rectangle net GND: 25563,14237 25627,14269
  rectangle net GND: 25605,14180.37 25747,14269
  rectangle net GND: 25587,14803 26043,14848
  rectangle net GND: 25704,13576 26051,13662
  rectangle net GND: 25735,14161 26044,14223
  rectangle net GND: 25723,14529 26049,14643
  rectangle net GND: 26027,14777 26066,14961
  rectangle net GND: 25499,15598 25617,15701

## Silkscreen, mask and mechanical layers (free items; w line width, h text height)
Top Overlay:
  circle w1: c24826.44,15989.78 r208.66
  circle w1: c24826.44,15989.78 r144.69
  circle w1: c24826.44,15438.6 r196.85
  circle w1: c24826.44,13529.15 r66.93
  lines w1: 24472.11,15891.36 24472.11,16088.21 ; 24486.84,15891.36 24432.74,15891.36 24432.74,16088.21 24486.84,16088.21 ; 24609.9,12659.07 24609.9,12722.06 ; 25042.97,12659.07 25042.97,12722.06 ; 25166.04,15891.36 25220.14,15891.36 25220.14,16088.21 25166.04,16088.21 ; 25180.77,15891.36 25180.77,16088.21 ; 24531.16,12659.07 25121.71,12659.07 25121.71,12722.06 24531.16,12722.06 24531.16,12659.07 ; 24590.22,15733.91 cw(c24808.33,15989.78) 24590.22,16245.66 25062.66,16245.66 cw(c24844.55,15989.78) 25062.66,15733.91 24590.22,15733.91 ; 24708.33,13411.04 24708.33,13647.26 24944.55,13647.26 24944.55,13411.04 24708.33,13411.04 ; 24787.07,13044.9 24787.07,13107.89 24865.81,13107.89 24865.81,13044.9 24787.07,13044.9 ; 24787.07,13950.41 24787.07,14013.4 24865.81,14013.4 24865.81,13950.41 24787.07,13950.41 ; 24787.07,14310.65 24787.07,14361.83 24865.81,14361.83 24865.81,14310.65 24787.07,14310.65 ; 24787.07,14664.98 24787.07,14716.16 24865.81,14716.16 24865.81,14664.98 24787.07,14664.98 ; 24787.07,15019.31 24787.07,15070.49 24865.81,15070.49 24865.81,15019.31 24787.07,15019.31
  text "+" at 23800,16411 h39.37 r90
  text "-" at 23805,16273 h39.37 r90
  text "+5V" at 24533,12806 h39.37
  text "GND" at 24530,12561 h39.37
Bottom Overlay:
  circle w1: c25672.9,12800.8 r127.95
  circle w1: c23979.98,12800.8 r127.95
  circle w1: c25672.9,15989.78 r127.95
  text "B-" at 25616,15689 h39.37
  text "B+" at 25597,15119 h39.37
  text "3V3" at 25604,14889 h39.37
  text "GND" at 25604,14810 h39.37
  text "O" at 25632,14657 h39.37
  text "SWS" at 23797,14642 h39.37
  text "GND" at 23690,14597 h39.37 r180
  text "3V3" at 23795,14484 h39.37
  text "+" at 25725,14444 h39.37
  text "+" at 24094,14239 h39.37 r90
  text "-" at 25737,14236 h39.37 r90
  text "+" at 25750,13674 h39.37 r90
  text "+" at 24101,13444 h39.37 r90
  text "+" at 24097,13330 h39.37 r90
  text "+" at 25731,13098 h39.37 r90
  text "VBUS" at 24882,12860 h39.37
  text "G" at 24618,12544 h39.37
  text "G" at 25079,12540 h39.37
Top Solder:
  rectangle: 24923.19,12548.18 24994.69,12652.68
  rectangle: 24790.69,12549.68 24862.19,12653.68
  rectangle: 24661.19,12548.68 24732.69,12653.68
  rectangle: 24922.19,12726.68 24996.69,12813.18
  rectangle: 24789.19,12726.18 24863.69,12811.68
  rectangle: 24659.69,12726.6 24734.19,12813.68
Bottom Solder:
  region: 24731.19,12653.68 24661.19,12653.68 24661.19,12531 24731.19,12531
  region: 24862.19,12653.68 24792.19,12653.68 24792.19,12532 24862.19,12532
  region: 24994.19,12652.68 24924.19,12652.68 24924.19,12535 24994.19,12535
  rectangle: 24924.19,12727.68 24994.19,12815.26
  rectangle: 24792.19,12727.1 24862.19,12814.68
  rectangle: 24662.19,12727.1 24732.19,12814.68

## Text inside footprints (layer, text, board x,y; h text height)
U9: Top Overlay "G" at 25728.28,16414 h30 r180; Top Overlay "O" at 25796.71,16388 h30; Top Overlay "V" at 25635.71,16416 h30 r180